# Altium PCB MCP73871_Battery charger.PcbDoc
Units mm, origin at the board's own origin, x right, y up, seen from the top; angles counter-clockwise.
Board outline 152.4 x 101.6 mm, 2 copper layers (Top Layer, Bottom Layer); 16 components, 13 nets, 51 pads, 12 vias.
Unrouted connection lines stored in the file: 5.
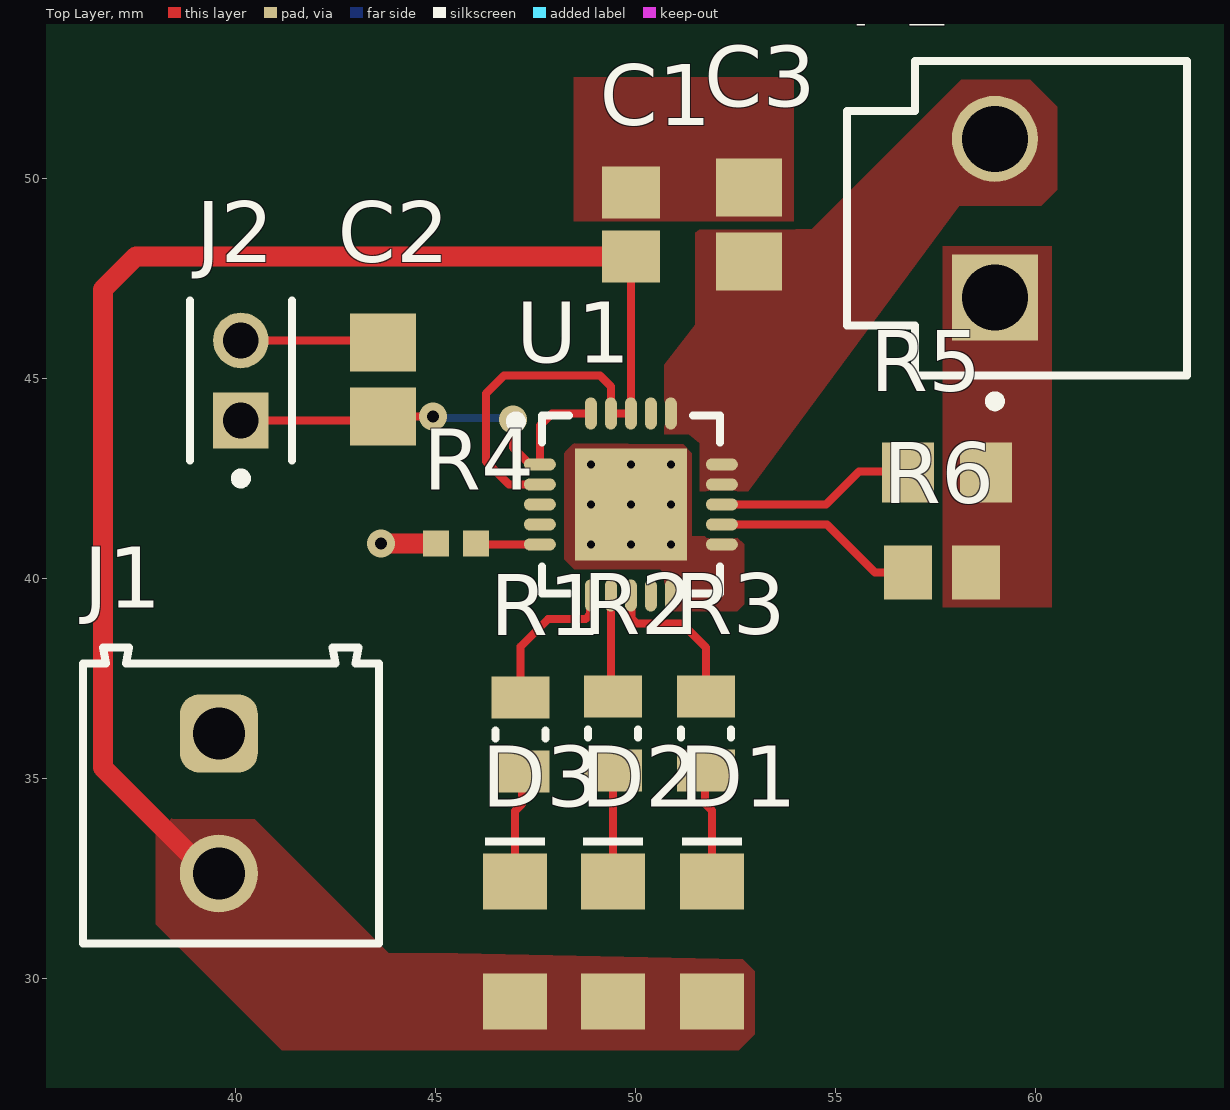
[diagram p0: Top Layer view]
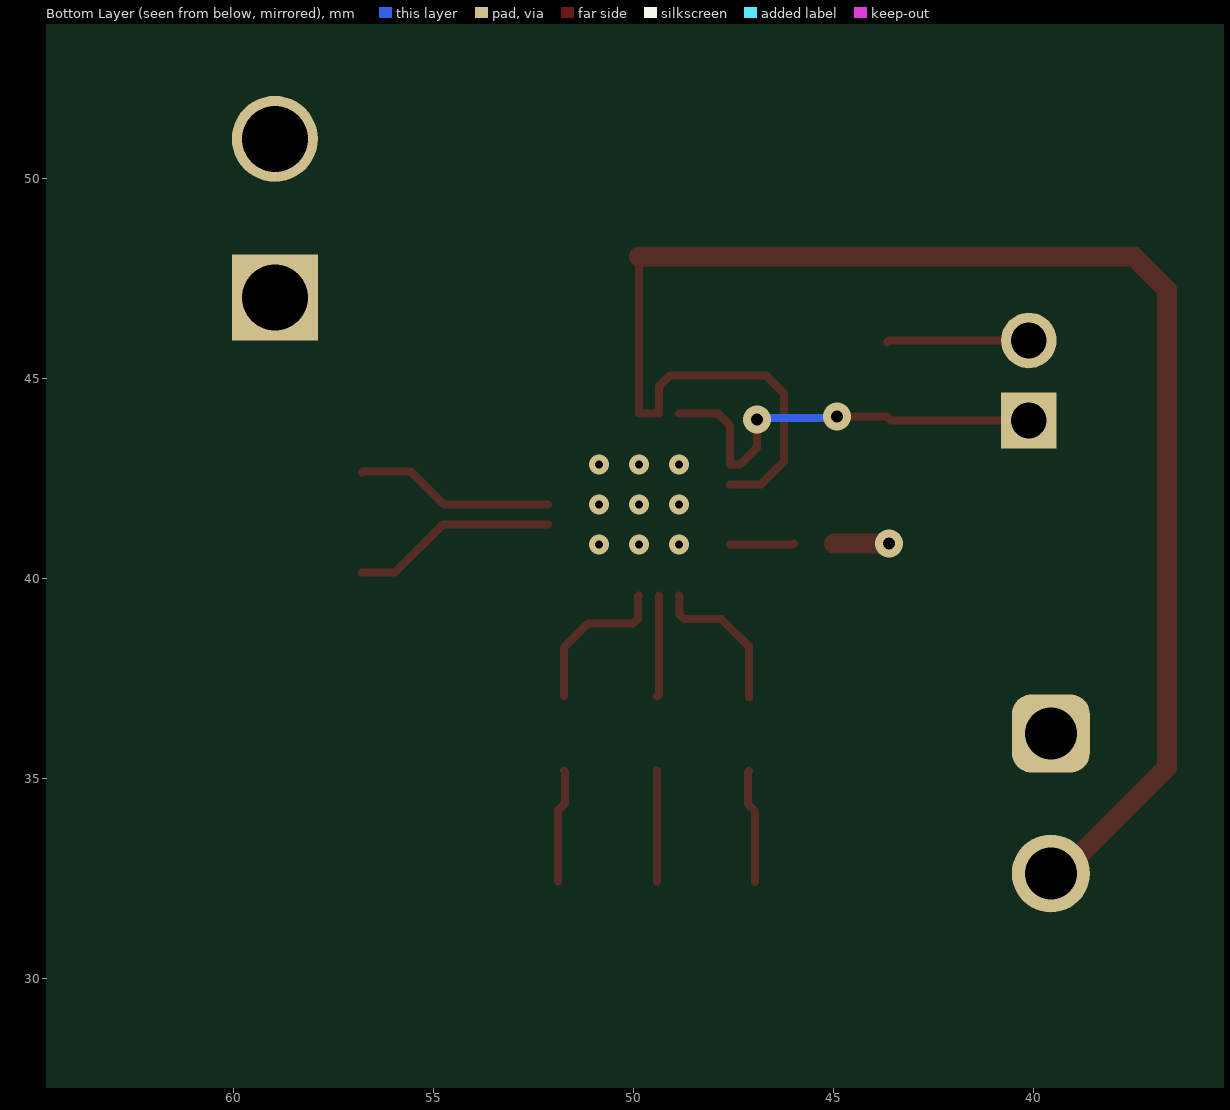
[diagram p1: Bottom Layer view, seen from below]
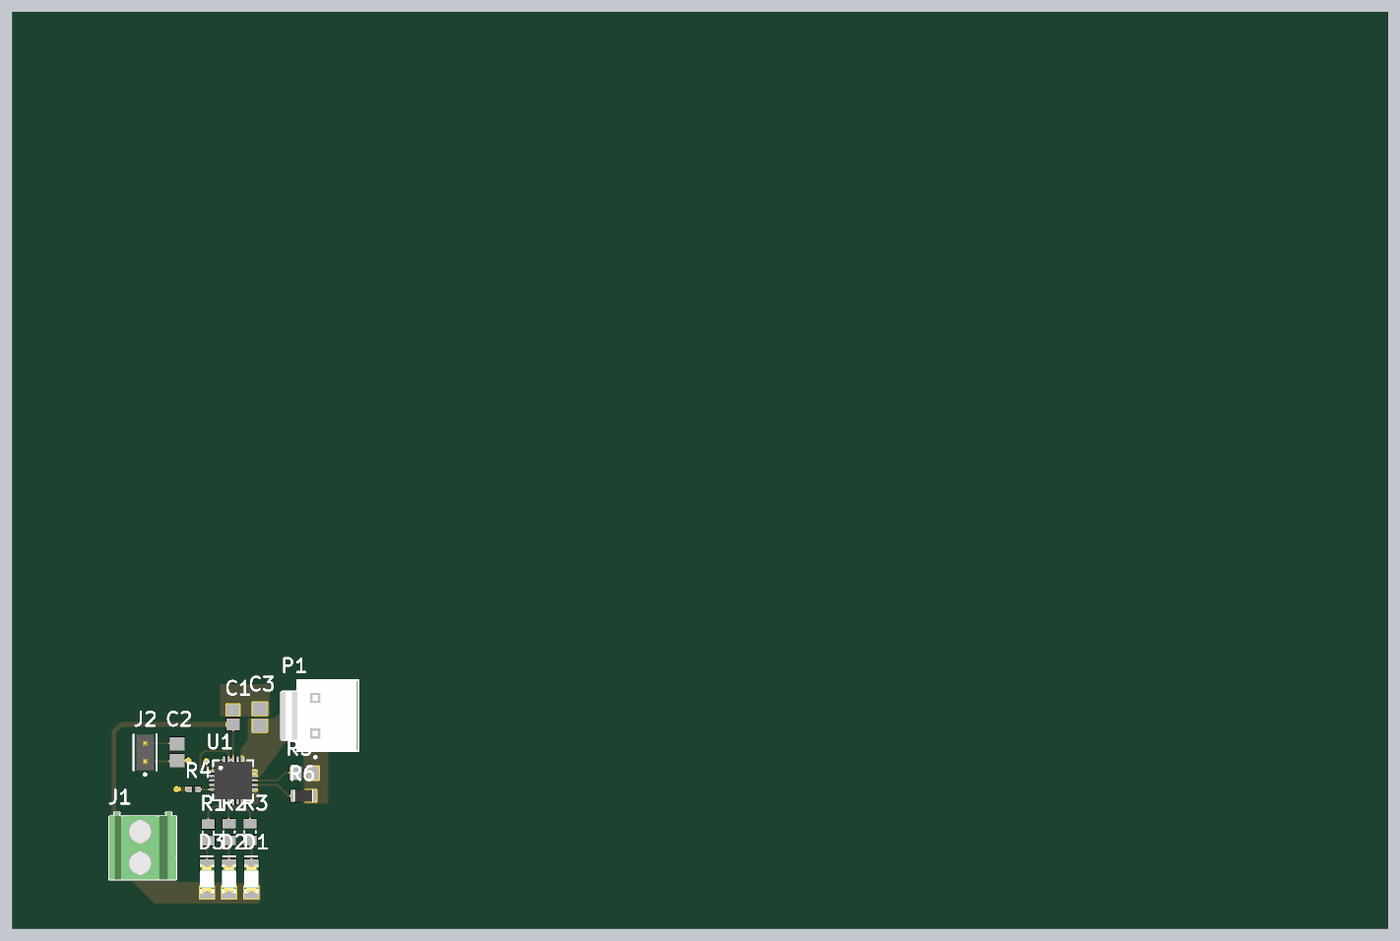
[diagram p2: 3D render of the assembled board from above, using the file's embedded part models]

## Layer stack, top to bottom
Top Solder: solder mask 0.0102, Solder Resist, Dk 3.5
Top Layer: signal copper 0.0356
Dielectric 1: dielectric 0.32, FR-4, Dk 4.8
Bottom Layer: signal copper 0.0356
Bottom Solder: solder mask 0.0102, Solder Resist, Dk 3.5

## Board outline
25.4,25.4 177.8,25.4 177.8,127 25.4,127

## Design rules (kind name [scope] priority, off if disabled: settings)
Clearance [All] p1: gap=0.2 ignorepadtopadclearanceinfootprint=FALSE
PlaneConnect [All] p1: planeconnectstyle=Direct reliefexpansion=0.508 reliefentries=4 reliefconductorwidth=0.254 reliefairgap=0.254
PolygonConnect [All] p1: connectstyle=Direct reliefconductorwidth=0.254 reliefentries=4 polygonreliefangle="90 Angle" airgapwidth=0.254
RoutingVias [All] p1: holewidth=0.3 width=0.7 viastyle="Through Hole" minholewidth=0.2 minwidth=0.5 maxholewidth=0.5 maxwidth=0.7
SolderMaskExpansion [All] p1: expansion=0.102 istentingtop=FALSE
Width [All] p1: maxlimit=0.5 minlimit=0.2 preferedwidth=0.2
29 further rules are at their usual default settings.

## Components (designator, comment, footprint, x,y, rotation, side; value= is the part's Value field where it differs from the comment)
C1 "10uF" CAPC2013X145X50NL20T25 49.875,48.85 r270 top
C2 "4.7uF" CAPC2014X150X70ML20 43.675,44.975 r270 top
C3 "4.7uF" CAPC2014X150X70ML20 52.825,48.85 r270 top
D1 "150120RS75000" WL-SMCW_1206_150120xx75000 51.9,30.925 r270 top
D2 "150120GS75000" WL-SMCW_1206_150120xx75000 49.425,30.925 r270 top
D3 "150120BS75000" WL-SMCW_1206_150120xx75000 46.975,30.925 r270 top
J1 "691214110002" 691214110002 39.875,34.375 r270 top
J2 "TMM-102-01-L-S" FP-TMM-102-01-L-S-MFG 40.125,44.95 r90 top
P1 "B2P-VH(LF)(SN)" JST-B2P-VH(LF)(SN)_V 60.375,49.009 r90 top
R1 "470" RESC2013X50X30NL20T20 47.121,36.1 r90 top
R2 "470" RESC2013X50X30NL20T20 49.425,36.125 r90 top
R3 "470" RESC2013X50X30NL20T20 51.75,36.125 r90 top
R4 "10k" RESC1005X40X25ML05T05 45.5,40.875 r180 top
R5 "1k" RESC2013X55X40ML15T20 57.775,42.65 r0 top
R6 "10k" RESC2013X60X40NL20T25_A 57.65,40.146 r0 top
U1 "MCP73871" MCP73871 49.875,41.85 r0 top

## Footprints (in the part's own frame and the unit in brackets; to place one, negate y for a bottom-side part, rotate by r counter-clockwise, add the part's x,y. Pads: shape width x height; smd on the part's side, far side on the other; paste and mask are expansions set on the pad)
691214110002 [mm] "3.50 mm Horizontal Entry Modular, 2p"
  rrect50% 1.95x1.95 hole 1.3: 1(-1.75,-0.3)
  round 1.95 hole 1.3: 2(1.75,-0.3)
  silkscreen extent -3.9,-3.7 3.5,3.7, body extent -3.95,-3.7 3.5,3.7, height 8.55
CAPC2013X145X50NL20T25 [mm] "Chip Capacitor, 2-Leads, Body 2.00x1.25mm, IPC Medium Density"
  rect 1.3x1.45 smd: 1(-0.8,0) 2(0.8,0)
  body extent -1.1,-0.72 1.1,0.72, height 1.45
CAPC2014X150X70ML20 [mm] "Chip Capacitor, 2-Leads, Body 2.00x1.35mm, IPC Low Density"
  rect 1.45x1.65 smd: 1(-0.925,0) 2(0.925,0)
  body extent -1.1,-0.77 1.1,0.77, height 1.5
FP-TMM-102-01-L-S-MFG [mm]
  rect 1.39x1.39 hole 0.89 paste-2539.97 mask+0: 1(-1,0)
  round 1.39 hole 0.89 paste-2539.97 mask+0: 2(1,0)
  silkscreen extent -2.57,-1.28 2,1.28, body extent -2.1,-1.15 2.1,1.15, height 0.25
JST-B2P-VH(LF)(SN)_V [mm] "THD, 2-Leads, Body 8.5x7.86mm, Pitch 3.96mm"
  rect 2.15x2.15 hole 1.65: 1(-1.98,1.4)
  round 2.15 hole 1.65: 2(1.98,1.4)
  silkscreen extent -4.7,-3.4 3.93,5.1, body extent -3.93,-3.2 3.93,5.3, height 10.9
MCP73871 [mm] "QFN, 20-Leads, Body 4,08x4,08mm, Pitch 0,50mm, Thermal Pad 4,00x2,20mm, IPC Medium Density"
  oval 0.8x0.3 smd: 1(-2.275,1) 2(-2.275,0.5) 3(-2.275,0) 4(-2.275,-0.5) 5(-2.275,-1) 11(2.275,-1) 12(2.275,-0.5) 13(2.275,0) 14(2.275,0.5) 15(2.275,1)
  oval 0.3x0.8 smd: 6(-1,-2.275) 7(-0.5,-2.275) 8(0,-2.275) 9(0.5,-2.275) 10(1,-2.275) 16(1,2.275) 17(0.5,2.275) 18(0,2.275) 19(-0.5,2.275) 20(-1,2.275)
  rect 2.8x2.8 smd: 11(0,0)
  silkscreen extent -3,-2.23 2.23,2.22, body extent -2.09,-2.09 2.09,2.09, height 0.9
RESC1005X40X25ML05T05 [mm] "Chip Resistor, 2-Leads, Body 1.00x0.50mm, IPC Low Density"
  rect 0.65x0.65 smd: 1(-0.5,0) 2(0.5,0)
  body extent -0.53,-0.27 0.53,0.28, height 0.4
RESC2013X50X30NL20T20 [mm] "Chip Resistor, 2-Leads, Body 2.00x1.25mm, IPC Medium Density"
  rect 1.05x1.45 smd: 1(-0.925,0) 2(0.925,0)
  silkscreen extent -0.1,-0.63 0.1,0.63, body extent -1.1,-0.72 1.1,0.72, height 0.5
RESC2013X55X40ML15T20 [mm] "Chip Resistor, 2-Leads, Body 2.00x1.25mm, IPC Low Density"
  rect 1.3x1.5 smd: 1(-0.975,0) 2(0.975,0)
  body extent -1.07,-0.7 1.08,0.7, height 0.55
RESC2013X60X40NL20T25_A [mm] "Chip Resistor, 2-Leads, Body 2.20x1.35mm, IPC Medium Density"
  rect 1.2x1.35 smd: 1(-0.85,0) 2(0.85,0)
  body extent -1.1,-0.67 1.1,0.67, height 0.6
WL-SMCW_1206_150120xx75000 [mm] "SMD Mono-color Chip LED, body 3.2x1.6mm"
  rect 1.4x1.6 smd: 1(-1.5,0) 2(1.5,0)
  silkscreen extent -2.6,-0.75 -2.4,0.75, body extent -1.6,-0.8 1.6,0.8, height 0.68

## Part data
C1: library part CMP-2000-06079-1, "Chip Capacitor, 10 uF, -20% to +80%, 10 V, -30 to 85 degC, 0805 (2012 Metric), RoHS, Tape and Reel", Capacitance=10µF, Manufacturer=Yageo, Operating Temperature=-30°C~85°C, Package / Case=0805(2012Metric), Package Description="2-Pin Surface Mount Device, Body 2 x 1.25 mm", Package Reference=0805, Ratings=-, Standard Package=1, Temperature Coefficient=Y5V(F), Tolerance=-20%,+80%, Voltage - Rated=10V, Applications=GeneralPurpose, Catalog Drawings=CC_0805_1.25, Category=Capacitors, Datasheet URL=http://www.yageo.com/documents/recent/UPY-GPHC_Y5V_6.3V-to-50V_6.pdf, Datasheet Version="Rev. 6, 01/2016", Family=CeramicCapacitors, Featured Product=Yageo-HighCapacitanceMLCC, Features=-, Height - Seated (Max)=-, Lead Spacing=-, Lead Style=-, Manufacturer URL=http://www.yageo.com/, Mounting Technology=SurfaceMount, Mounting Type=SurfaceMount,MLCC, Online Catalog=CCSeries, Other Names=311-1355-6, Packaging=Digi-Reel®, Product Training Modules=HighCapacitanceMLCCs, Series=CC, Size / Dimension="0.079\"Lx0.049\"W(2.00mmx1.25mm)", Thickness (Max)="0.049\"(1.25mm)"
C2 C3: library part CMP-2007-00037-1, Manufacturer="AVX Interconnect / Elco", Part Number=TACR475M010RTA
D1: library part CMP-1426-00013-3, Case Code (Imperial)=1206, Case Code (Metric)=3216, Color=Red, Forward Current=100mA, Forward Voltage=2V, Max Junction Temperature (Tj)=95°C, Max Operating Temperature=85°C, Max Reverse Voltage (DC)=5V, Min Operating Temperature=-40°C, Power Dissipation=72mW, Test Current=20mA, Case/Package=1206, Dominant Wavelength=625nm, Height=680µm, Length=3.2mm, Lens Style="Clear, Rectangular", Luminous Intensity=150mcd, Mount="Surface Mount", NexarPartId=29717788, Packaging="Tape and Reel", Peak Wavelength=630nm, REACH SVHC=Unknown, Reverse Voltage=5V, RoHS=Compliant, Viewing Angle=140°, Wavelength=625nm, Width=1.6mm
D2: library part CMP-1426-00014-3, Case Code (Imperial)=1206, Case Code (Metric)=3216, Color=Green, Forward Current=100mA, Forward Voltage=3.2V, Max Junction Temperature (Tj)=95°C, Max Operating Temperature=85°C, Max Reverse Voltage (DC)=5V, Min Operating Temperature=-40°C, Power Dissipation=105mW, Test Current=20mA, Case/Package=1206, Dominant Wavelength=525nm, Height=680µm, Length=3.2mm, Lens Style="Clear, Rectangular", Luminous Intensity=450mcd, Mount="Surface Mount", NexarPartId=29717787, Packaging="Tape and Reel", Peak Wavelength=515nm, REACH SVHC=Unknown, Reverse Voltage=5V, RoHS=Compliant, Viewing Angle=140°, Wavelength=520nm, Width=1.6mm
D3: library part CMP-1426-00015-2, Case Code (Imperial)=1206, Case Code (Metric)=3216, Color=Blue, Forward Current=100mA, Forward Voltage=3.2V, Manufacturer Package Identifier=LED_1206, Max Operating Temperature=85°C, Max Reverse Voltage (DC)=5V, Min Operating Temperature=-40°C, Test Current=20mA, Case/Package=1206, Dominant Wavelength=470nm, Height=680µm, Length=3.2mm, Lens Style="Clear, Rectangular", Luminous Intensity=145mcd, Mount="Surface Mount", NexarPartId=29717786, Packaging="Tape and Reel", Peak Wavelength=465nm, REACH SVHC=Unknown, RoHS=Compliant, Viewing Angle=140°, Wavelength=470nm, Width=1.6mm
J1: library part CMP-1502-02464-2, Color="Blue, Green", Current=10A, Max Operating Temperature=105°C, Min Operating Temperature=-40°C, Voltage=300V, Contact Material=Brass, Contact Plating="Brass, Tin", Current Rating=10A, Height=8.7mm, Housing Material=Nylon, Lead Pitch=3.5mm, Length=7.4mm, Mount="Through Hole", NexarPartId=18818288, Number of Contacts=2, Number of Levels=1, Number of Pins=2, Number of Positions Per Level=2, Number of Rows=1, Packaging=Box, Pitch=3.5052mm, Plating="Brass, Steel", REACH SVHC=Unknown, RoHS=Compliant, Stripping Length=-6mm, Termination=Screw, Voltage Rating=300V, Width=7.9mm, Wire Gauge (Max)=24AWG, Wire Gauge (Min)=16AWG, Wire/Cable Gauge=24AWG
J2: library part CMP-02766-001606-1, "CONN HEADER VERT 2POS 2MM", Housing Color=Black, Max Current Rating=3.9A, Max Operating Temperature=125°C, Max Voltage Rating (AC)=500V, Min Operating Temperature=-55°C, Connector Type=Header, Contact Finish - Mating=GOLD, Contact Material=Bronze, Contact Plating=Gold, Contact Shape=Square, Contact Type="Male Pin", Depth=1.97mm, Fastening Type=Pull, Gender=Male, Housing Material=Polymer, Insulation Color=Black, Insulation Material=Polymer, Lead Free="Lead Free", Length=4mm, Number of Contacts=2, Number of Positions=2, Number of Rows=1, Orientation=Straight, Packaging=Bulk, Pitch=2mm, Radiation Hardening=No, REACH SVHC="No SVHC", RoHS Compliant=Yes, Series=TMM, Termination=Solder
P1: library part CMP-002-00025-2, "Male Header, Pitch 3.96 mm, 1 x 2 Position, Height 10.9 mm, Tail Length 3.7 mm, -25 to 85 degC, RoHS, Bulk", Manufacturer=JST, Max Operating Temperature=85°C, Min Operating Temperature=-25°C, Package Description="Male Header, Pitch 3.96 mm, 1 x 2 Position, Height 10.9 mm, Tail Length 3.7 mm", Case/Package=B2P-VH(LF)(SN), Connector Type=Header, Datasheet URL=http://www.jst-mfg.com/product/pdf/eng/eVH.pdf, Datasheet Version=May-16, Gender=Male, Manufacturer URL=http://www.jst.com/home2.html, Mounting Technology=TH, Package Reference=B2P-VH(LF)(SN), RoHS Compliant=Unknown
R1 R2 R3: library part CMP-2001-03932-1, Manufacturer="Vishay Dale", Part Number=CRCW0805470RFKEA
R4: library part CMP-2002-01181-1, Manufacturer=Panasonic, Part Number=ERT-J0EM103J
R5: library part CMP-2001-04737-1, Manufacturer="Vishay Dale", Part Number=TNPW08051K00BEEA
R6: library part CMP-2001-00582-2, "Metal Film Chip Resistor, High Reliability Type, 0.125 W, +/- 0.1%, -55 to 155 degC, 0805 (2012 Metric), RoHS, Tape and Reel", Case Code - in=0805, Case Code - mm=2012, Manufacturer=Panasonic, Operating Temperature Range=-55Cto+155C, Package / Case=0805(2012metric), Package Description="2-Pin Surface Mount Device, Body 2 x 1.25 mm", Power Rating=125mW(1/8W), Resistance=10kOhms, Temperature Coefficient=25PPM/C, Tolerance=0.1%, Voltage Rating=100V, Brand=Panasonic, Datasheet URL=https://industrial.panasonic.com/cdbs/www-data/pdf/RDM0000/AOA0000C307.pdf, Datasheet Version=02/2016, Factory Pack Quantity=5000, Height=0.5mm, Length=2mm, Manufacturer URL=http://www.panasonic.com/, Mounting Technology=SurfaceMount, Package Reference=0805, Packaging=Reel, Product=ThinFilmResistorsSMD, Product Category=ThinFilmResistors-SMD, RoHS=Details, Series=ERA-6A, Termination Style=SMD/SMT, Type=MetalFilmChipResistors, Width=1.25mm
U1: "Li-Ion/Li-Polymer Battery Charge", ComponentLink1Description=DATASHEET, ComponentLink1URL=https://ww1.microchip.com/downloads/en/DeviceDoc/MCP73871-Data-Sheet-20002090E.pdf

## Via types
v1: diameter 0.5, hole 0.2, Top Layer to Bottom Layer, 9 vias
v2: diameter 0.7, hole 0.3, Top Layer to Bottom Layer, 3 vias

## Nets (pads, with @x,y where several pads share a name; then routed paths per layer and width w, separated by ;. In a path a pad name is that pad's centre, name@x,y a point inside that pad or via, vN(x,y) a via of type N, cw(c..) or ccw(c..) an arc to the next point about the centre after c; other vN are vias at no path point)
+5V: C1.2 D1.2 D2.2 D3.2 J1.2 U1.2 U1.18 U1.19 | length 41.3
  Top Layer w0.2: U1.2 46.825,42.35 46.25,42.925 46.25,44.625 46.7,45.075 49.1,45.075 49.375,44.8 U1.19 U1.18 C1.2
  Top Layer w0.5: J1.2 39.325,32.625 36.675,35.275 36.675,47.225 37.5,48.05 C1.2
GND: C1.1 C2.1 C3.1 J1.1 J2.2 P1.1 R4.2 R5.2 R6.2 U1.10 U1.11 | length 4.9
  Top Layer w0.2: J2.2 43.625,45.95 C2.1
  Top Layer w0.5: v2(43.625,40.875) R4.2
  other v1: 48.875,40.85 49.875,40.85 50.875,40.85 48.875,41.85 49.875,41.85 50.875,41.85 48.875,42.85 49.875,42.85 50.875,42.85
NetC3_2: C3.2 P1.2 U1.14 U1.15 U1.16
NetD1_1: D1.1 R3.1 | length 2.9
  Top Layer w0.2: R3.1 51.725,35.175 51.725,34.375 51.9,34.2 D1.1
NetD2_1: D2.1 R2.1 | length 2.8
  Top Layer w0.2: D2.1 R2.1
NetD3_1: D3.1 R1.1 | length 2.9
  Top Layer w0.2: D3.1@46.975,32.412 46.975,34.187 47.15,34.362 47.15,35.162 R1.1@47.125,35.187
NetR1_2: R1.2 U1.6 | length 3.8
  Top Layer w0.2: R1.2 47.121,38.296 47.806,38.981 48.739,38.981 48.856,39.098 48.856,39.556 U1.6
NetR2_2: R2.2 U1.7 | length 2.5
  Top Layer w0.2: U1.7 49.375,37.1 R2.2
NetR3_2: R3.2 U1.8 | length 4
  Top Layer w0.2: U1.8 49.894,39.556 49.894,38.998 50.017,38.875 51.15,38.875 51.75,38.275 R3.2
NetR4_1: R4.1 U1.5 | length 1.6
  Top Layer w0.2: R4.1 46.025,40.85 U1.5
NetR5_1: R5.1 U1.13 | length 5
  Top Layer w0.2: U1.13 54.75,41.85 55.575,42.675 56.775,42.675 R5.1
NetR6_1: R6.1 U1.12 | length 5.1
  Top Layer w0.2: U1.12 54.775,41.35 55.979,40.146 R6.1
SL: C2.2 J2.1 U1.1 U1.20 | length 10.8
  Top Layer w0.2: J2.1 43.575,43.95 C2.2 v2(44.925,44.05) ; v2(46.925,43.975) 46.925,43.275 47.35,42.85 U1.1 47.6,43.825 47.9,44.125 U1.20
  Bottom Layer w0.2: v2(44.925,44.05) 44.963,44.013 46.887,44.013 v2(46.925,43.975)
pads on no net: U1.3 U1.4 U1.9 U1.17

## Polygon pours and split planes (outlines as drawn)
+5V on Top Layer "+5V_L01_P014" (solid, pour order 14): 52.675,30.475 52.975,30.175 52.975,28.6 52.575,28.2 41.15,28.2 38,31.35 38,33.6 38.4,34 38.425,33.975 40.475,33.975 43.825,30.625 45.55,30.625
GND on Top Layer "GND_L01_P010" (solid, pour order 10): 57.675,48.3 57.675,39.275 60.4,39.275 60.4,48.3
GND on Top Layer "GND_L01_P013" (solid, pour order 13): 52.513,41.05 52.713,40.85 52.713,39.35 52.537,39.175 50.663,39.175 50.713,39.251 50.713,40.13 50.609,40.234 48.463,40.234 48.213,40.475 48.213,43.125 48.25,43.175 48.425,43.35 48.463,43.375 51.175,43.35 51.187,43.35 51.4,43.125 51.4,41.05
NetC3_2 on Top Layer "NETC3_2_L01_P004" (solid, pour order 4): 52.81,42.175 51.6,42.175 51.6,43.385 51.316,43.6 50.713,43.6 50.713,45.341 51.488,46.345 51.488,48.645 51.6,48.73 54.398,48.73 54.447,48.778 58.138,52.47 59.863,52.47 60.538,51.795 60.538,49.72 60.138,49.32 58.082,49.32
GND on Top Layer "GND_L01_P000" (solid, pour order 0): 53.95,48.925 53.95,52.525 48.45,52.525 48.45,48.925